# Altium PCB PCB1.PcbDoc (part 2 of 3)
Units mil, origin at the board's own origin, x right, y up, seen from the top; angles counter-clockwise.
Board outline 2406.58 x 2514.76 mil, 4 copper layers (Top Layer, GND1, GND2, Bottom Layer), stack 22.334 mil thick; 96 components, 76 nets, 372 pads, 263 vias.
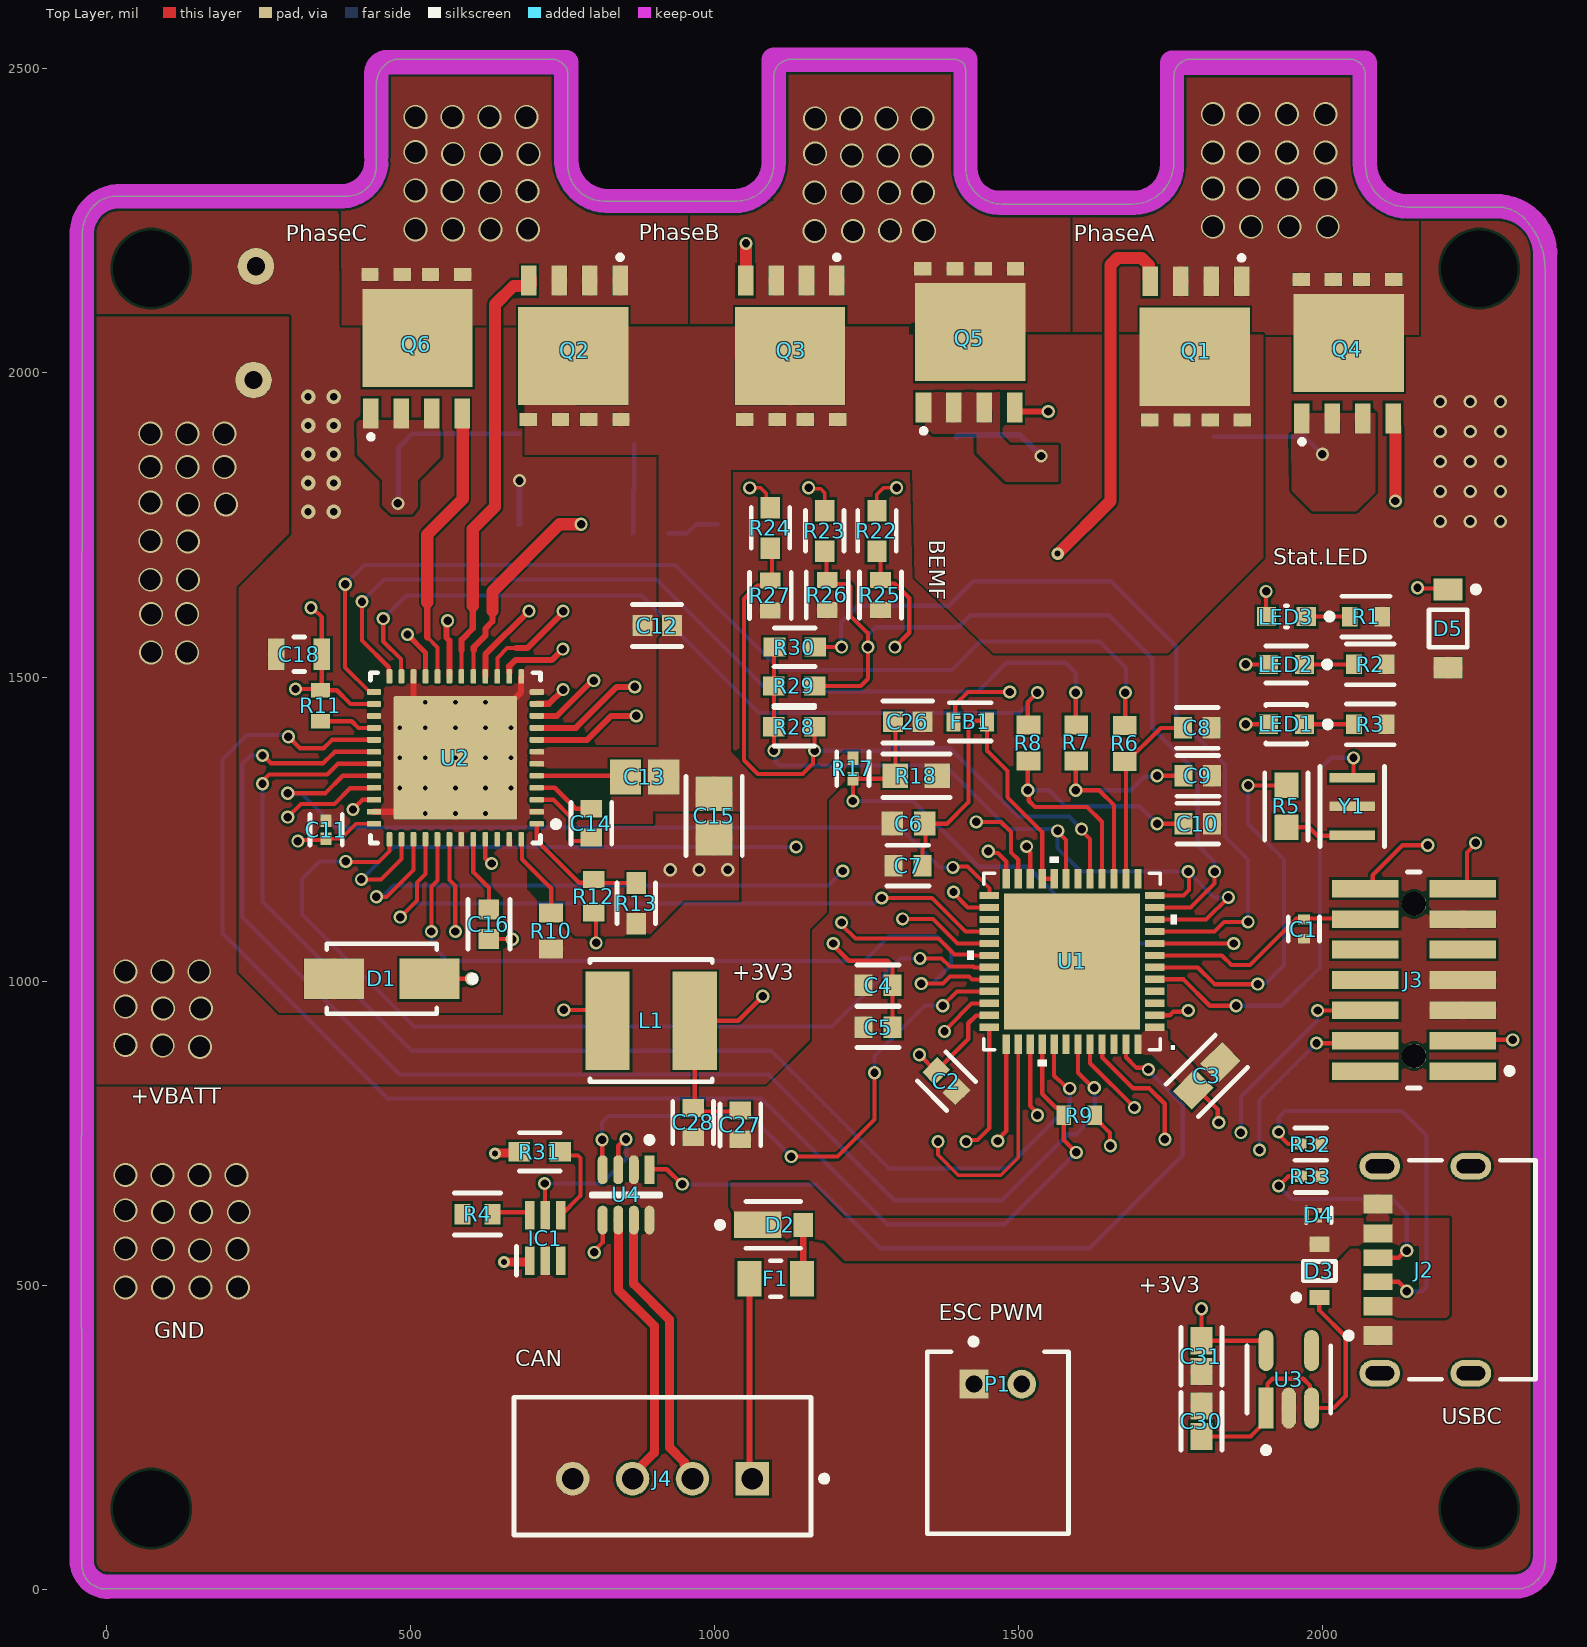
[diagram p0: Top Layer view]

## Part data (continued)
U3: library part CMP-12756-000035-1, "IC REG LINEAR 3.3V 600MA SOT25", Case/Package=SOT-23-5, Dropout Voltage=250mV, Max Input Voltage=6V, Max Operating Temperature=85°C, Max Output Current=600mA, Min Input Voltage=2.5V, Min Operating Temperature=-40°C, Output Voltage=3.3V, Package Quantity=1, Quiescent Current=55uA, Accuracy=1.5%, Height=1.3mm, Lead Free="Lead Free", Length=3.1mm, Mount="Surface Mount", Number of Outputs=1, Number of Pins=5, Number of Regulators=1, Output Current=600mA, Output Type=Fixed, Packaging="Tape and Reel", Polarity=Positive, Width=1.7mm
U4: library part CMP-04872-000047-1, "IC TRANSCEIVER 1/1 SOT23-8", Case/Package=SOT-23-8, Max Operating Temperature=125°C, Min Operating Temperature=-40°C, Data Rate=1Mbps, Lead Free="Lead Free", Mount="Surface Mount", Packaging="Cut Tape", Receiver Hysteresis=120mV, RoHS Compliant=Yes
Y1: library part CMP-06057-000001-1, "CERAMIC RES 8.0000MHZ 33PF SMD", Capacitance=33pF, Case/Package=SMD/SMT, Frequency Stability=0.13%, Frequency Tolerance=0.07%, Max Operating Temperature=125°C, Min Operating Temperature=-40°C, Resistor Type=Ceramic, Frequency=8MHz, Impedance=40R, Mount="Surface Mount", Packaging="Tape and Reel"

## Free pads (board coordinates)
  round 60 hole 125.98 paste-99999 mask-99999: 4(73.82,2171.26) 5(2256.89,2171.26) 6(73.82,132.87) 7(2256.89,132.87)
  round 60 hole 30 paste-99999 mask-99999: 8(242.05,1988.19)
  round 60 hole 30: 9(246.06,2175.2)

## Via types
v1: diameter 21.65, hole 13.78, Top Layer to Bottom Layer, 139 vias
v2: diameter 39.37, hole 33.46, Top Layer to Bottom Layer, 90 vias
v3: diameter 19.68, hole 7.87, Top Layer to Bottom Layer, 21 vias
v4: diameter 24, hole 12, Top Layer to Bottom Layer, 10 vias
v5: diameter 20, hole 10, Top Layer to Bottom Layer, 3 vias

## Nets (pads, with @x,y where several pads share a name; then routed paths per layer and width w, separated by ;. In a path a pad name is that pad's centre, name@x,y a point inside that pad or via, vN(x,y) a via of type N, cw(c..) or ccw(c..) an arc to the next point about the centre after c; other vN are vias at no path point)
+3V3: C2.1 C3.1 C4.1 C5.1 C11.2 C18.1 C27.1 C28.1 C31.2 D5.1 FB1.2 IC1.5 J3.3 L1.2 LED3.2 R9.2 R11.2 R12.2 R14.2 U1.1 U1.23 U1.35 U1.48 U2.26 U2.36 U3.5 U4.3 | length 2277.6
  Top Layer w6: C11.2@361.22,1234.11 385.69,1234.11 410.43,1258.86 U2.36@439.96,1258.86
  Top Layer w7: v1(311.02,1480.31) 350.39,1480.31 R11.2@352.36,1478.35 ; v1(314.96,1230.31) 316.86,1232.21 359.32,1232.21 C11.2@361.22,1234.11 ; v1@342.52,1612.2 341.54,1611.22 354.33,1598.43 C18.1@354.33,1537.4 354.33,1480.31 R11.2@352.36,1478.35 ; U2.26@439.96,1455.71 401.57,1455.71 378.94,1478.35 R11.2@352.36,1478.35 ; v1(720.47,667.32) 721,666.79 721,615.53 IC1.5@721.54,615 ; R12.2@801.18,1112.2 805.1,1108.28 v1(805.1,1062.99) ; U4.3@841.54,689.98 841.54,729.33 v1@851.38,739.17 ; C28.1@955.71,790.43 956.26,790.43 967.52,801.7 L1.2@967.52,935.04 1038.93,935.04 v1(1079.06,975.17) ; C28.1@958.66,785.59 C27.1@1042.89,785.59 ; v1(1194.88,1062.01) 1194.88,1059.06 1220.47,1033.46 1284.45,1033.46 1292.32,1025.59 C4.1@1292.32,993.11 C5.1@1292.32,924.21 C5.1@1292.32,921.26 ; v1(1336.61,878.94) 1363.22,852.33 C2.1@1364.2,852.33 1417.04,905.17 1417.04,930.75 1430.01,943.71 1451.41,943.71 U1.35@1451.6,943.9 ; FB1.2@1392.72,1426.18 1395.67,1429.13 1395.67,1454.72 1416.34,1475.39 v1(1485.24,1475.39) ; v1(1430.12,1261.81) 1470.47,1261.81 1487.2,1245.08 1487.2,1211.61 1499.02,1199.8 U1.23@1499.02,1168.48 ; R9.2@1625,779.53 1625,775.59 1649.93,750.66 1649.93,729.99 v1(1650.59,729.33) ; C3.1@1781.85,831.06 1785.08,831.06 1827.1,789.04 1827.1,769.36 v1(1828.74,767.72) ; v1@1800.2,460.63 C31.2@1800.2,408.84 1898.53,408.84 1906.5,400.87 U3.5@1906.5,392.72 ; v1(1906.5,1640.75) 1906.5,1600.39 LED3.2@1907.48,1599.41 ; v1@2154.53,1645.67 2207.28,1645.67 D5.1@2205.71,1644.09 ; J3.3@2236.61,902.95 2237.2,903.54 v1(2312.01,903.54)
  Bottom Layer w7: v1(720.47,667.32) 813.98,667.32 855.31,708.66 855.31,739.17 v1(854.33,740.16)
  other v1: 1800.35,461.54 336.46,1613.96 2155.51,1646.65